# Altium PCB counter.PcbDoc
Units mm, origin at the board's own origin, x right, y up, seen from the top; angles counter-clockwise.
Board outline 100.08 x 100 mm, 2 copper layers (Top Layer, Bottom Layer); 22 components, 32 nets, 149 pads, 0 vias.
Unrouted connection lines stored in the file: 109.
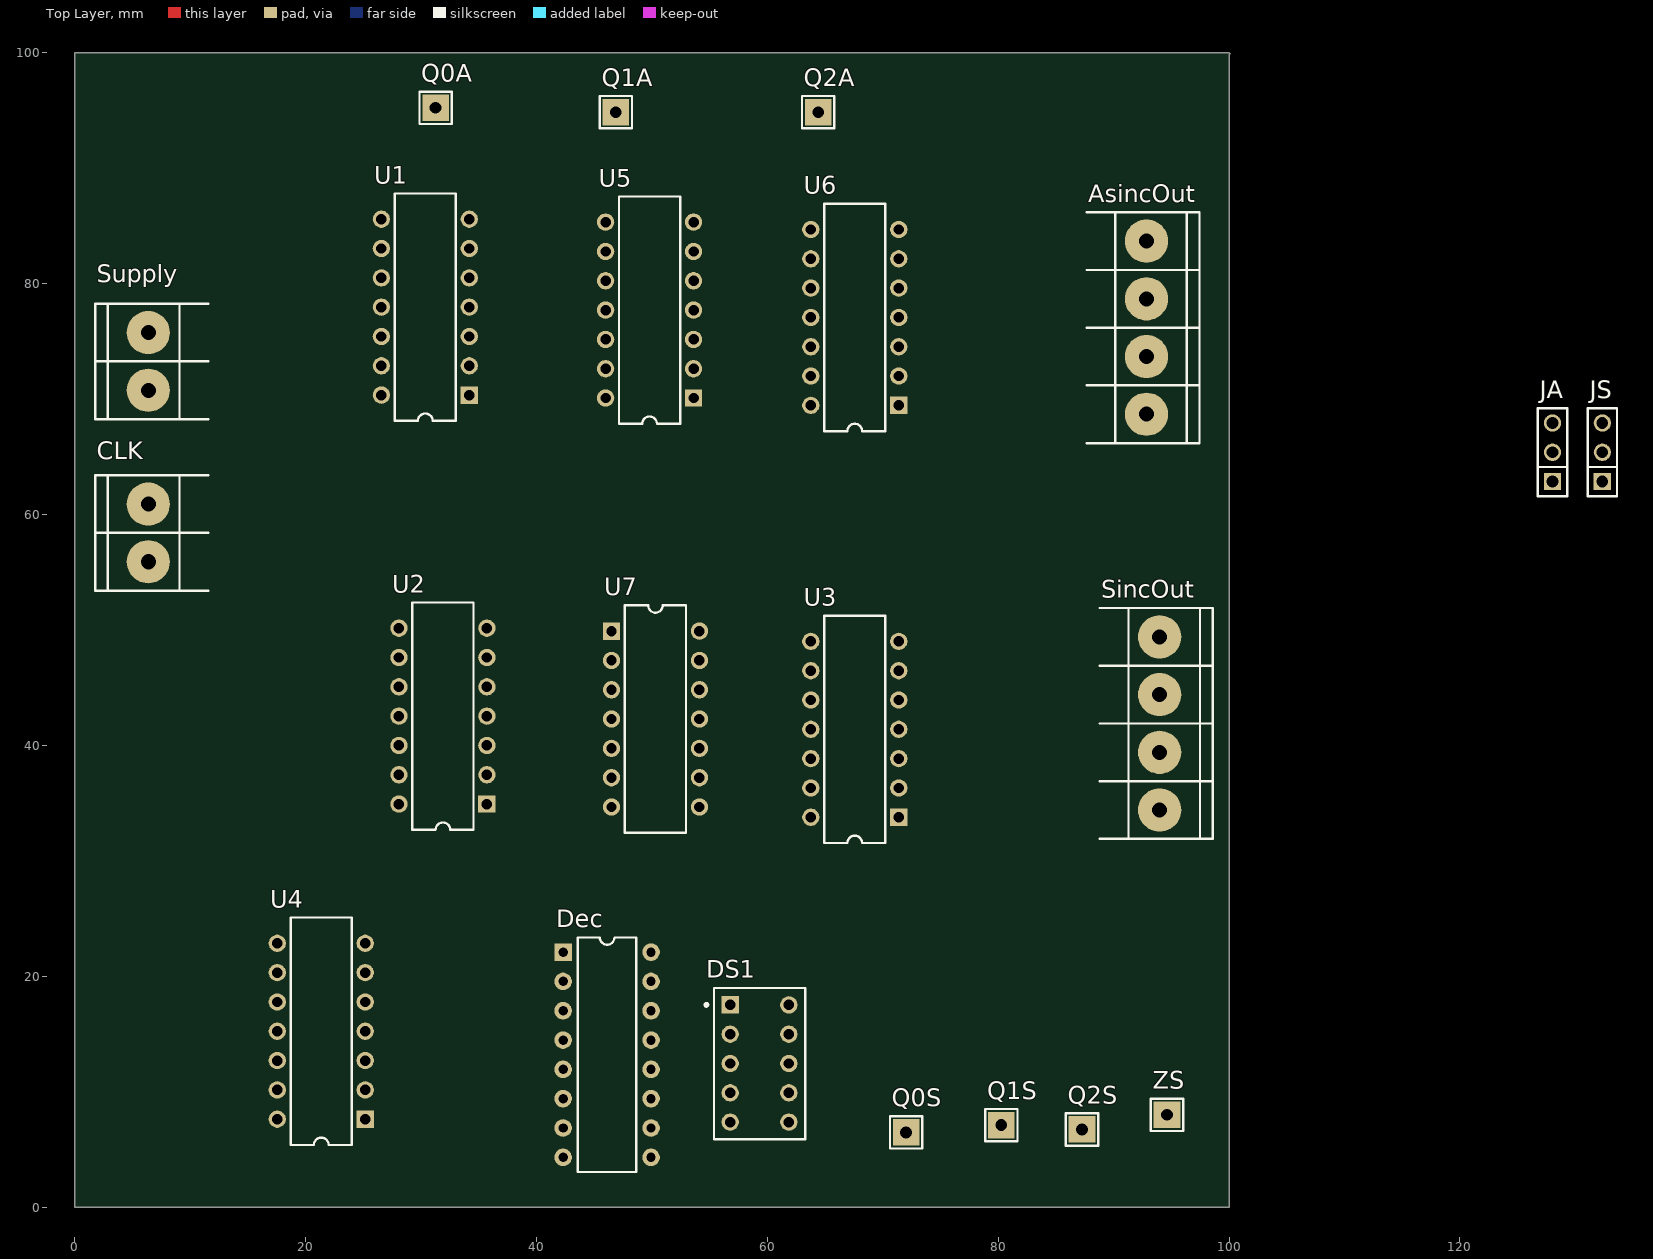
[diagram p0: Top Layer view]
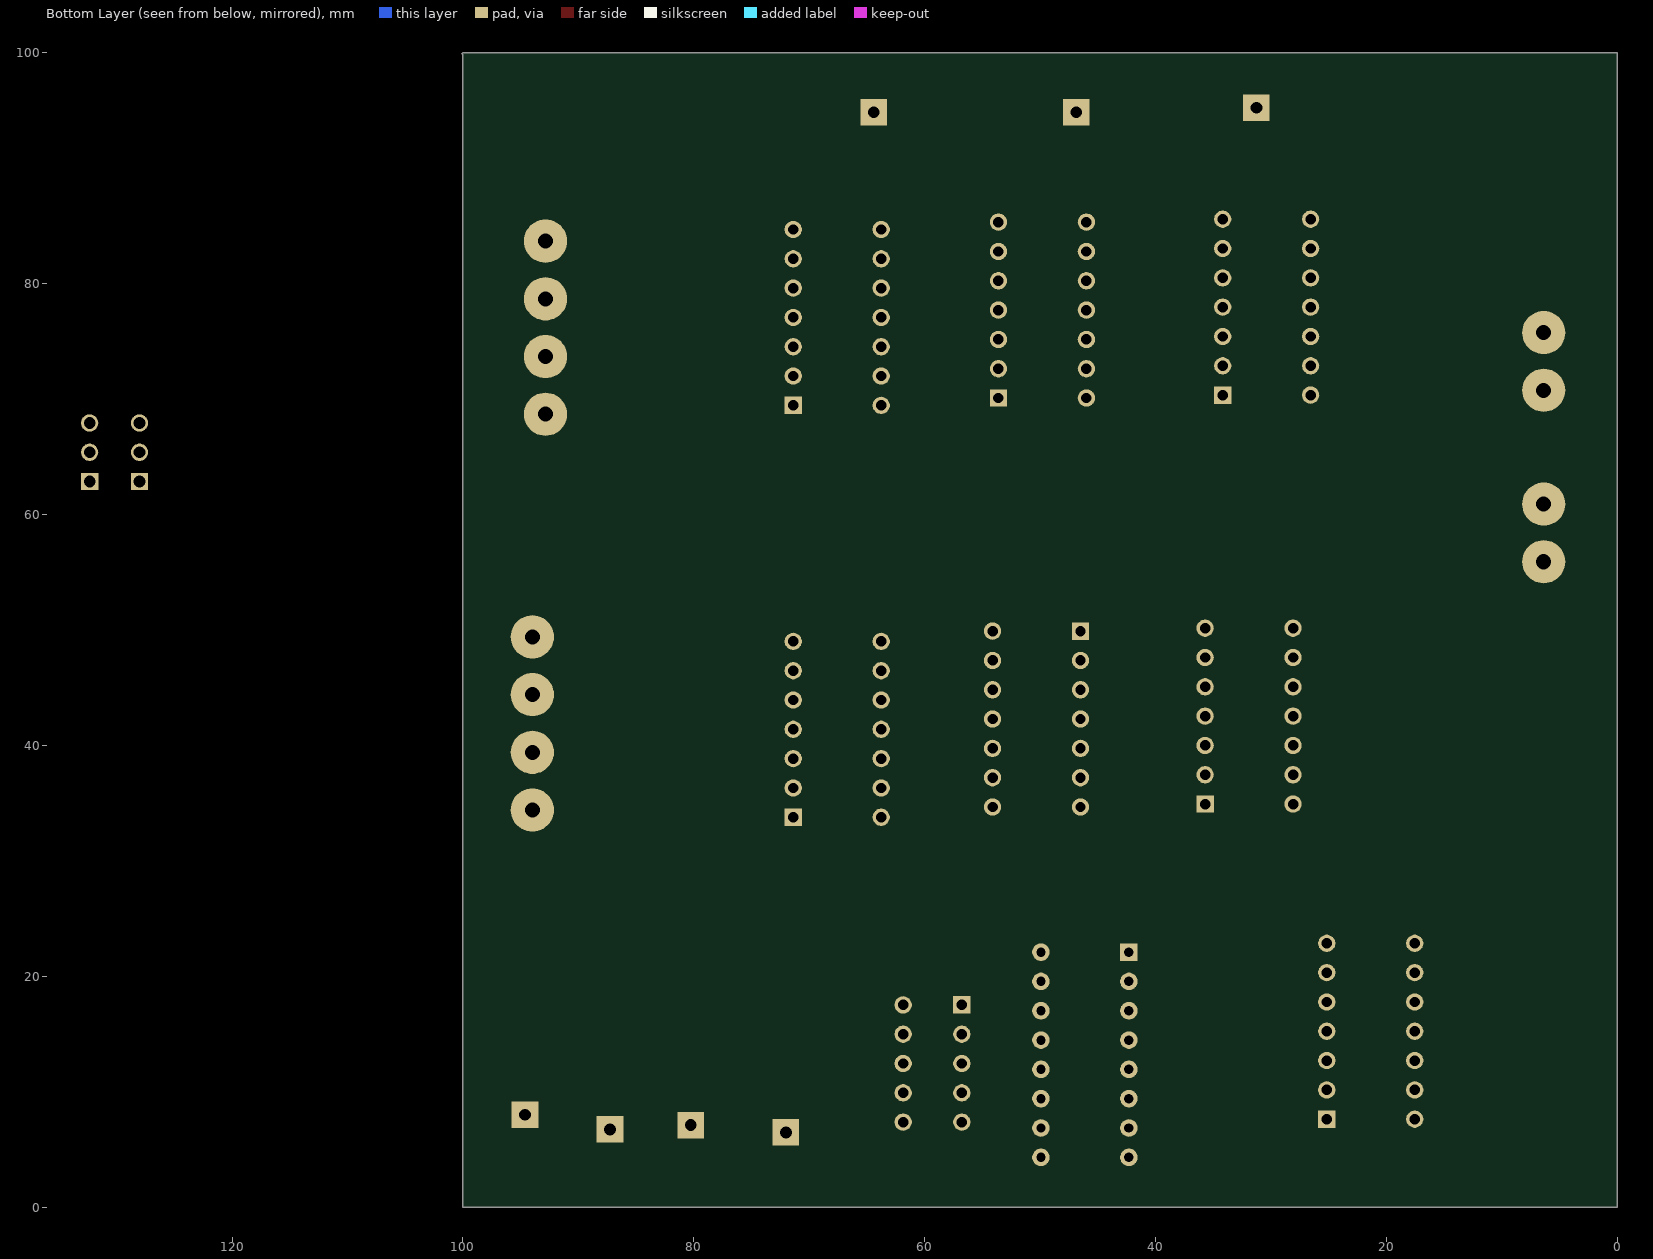
[diagram p1: Bottom Layer view, seen from below]

## Layer stack, top to bottom
Top Solder: solder mask 0.0102, Solder Resist, Dk 3.5
Top Layer: signal copper 0.0356
Dielectric 1: dielectric 0.32, FR-4, Dk 4.8
Bottom Layer: signal copper 0.0356
Bottom Solder: solder mask 0.0102, Solder Resist, Dk 3.5

## Board outline
0,0 0,100 100.025,100 100.076,99.949 100,99.873 100,0

## Design rules (kind name [scope] priority, off if disabled: settings)
Clearance [All] p1: gap=0.5
PolygonConnect [All] p1: connectstyle=Relief reliefconductorwidth=0.254 reliefentries=4 polygonreliefangle="90 Angle" airgapwidth=0.254
RoutingVias [All] p1: holewidth=0.3 width=2 viastyle="Through Hole" minholewidth=0.3 minwidth=2 maxholewidth=0.3 maxwidth=2
SolderMaskExpansion [All] p1: expansion=0.102
Width [All] p1: maxlimit=0.7 minlimit=0.7 preferedwidth=0.7
30 further rules are at their usual default settings.

## Components (designator, comment, footprint, x,y, rotation, side; value= is the part's Value field where it differs from the comment)
AsincOut "BORNERA4" BORNERA4 92.837,76.2 r180 top
CLK "BORNERA 2" BORNERA2 6.35,58.42 r0 top
Dec "CD4511" DIP16 42.291,22.098 r0 top
DS1 "Dpy Red-CC" A 59.309,12.446 r0 top
JA "JUMPER" JUMPER3 128.016,65.405 r90 top
JS "JUMPER" JUMPER3 132.334,65.405 r90 top
Q0A "TP" TPTH 31.242,95.25 r0 top
Q0S "TP" TPTH 72.009,6.477 r0 top
Q1A "TP" TPTH 46.863,94.869 r0 top
Q1S "TP" TPTH 80.264,7.112 r0 top
Q2A "TP" TPTH 64.389,94.869 r0 top
Q2S "TP" TPTH 87.249,6.731 r0 top
SincOut "BORNERA4" BORNERA4 93.98,41.91 r180 top
Supply "BORNERA 2" BORNERA2 6.35,73.279 r0 top
U1 "SN74ALS86N" N014 30.353,77.978 r90 top
U2 "SN74ALS86N" N014 31.877,42.545 r90 top
U3 "SN74ALS08N" N014 67.564,41.402 r90 top
U4 "SN74ALS32N" N014 21.336,15.24 r90 top
U5 "SN74LS74AN" N014D 49.784,77.724 r90 top
U6 "SN74LS74AN" N014D 67.564,77.089 r90 top
U7 "SN74LS74AN" N014D 50.292,42.291 r270 top
ZS "TP" TPTH 94.615,8.001 r0 top

## Footprints (in the part's own frame and the unit in brackets; to place one, negate y for a bottom-side part, rotate by r counter-clockwise, add the part's x,y. Pads: shape width x height; smd on the part's side, far side on the other; paste and mask are expansions set on the pad)
A [mm] "LED, 7-Segment Display, 7.62 mm, RHD; 10 Leads; Row Space 5.08 mm; Pitch 2.54 mm"
  rect 1.5x1.5 hole 0.9: 1(-2.54,5.08)
  round 1.5 hole 0.9: 2(-2.54,2.54) 3(-2.54,0) 4(-2.54,-2.54) 5(-2.54,-5.08) 6(2.54,-5.08) 7(2.54,-2.54) 8(2.54,0) 9(2.54,2.54) 10(2.54,5.08)
  silkscreen extent -4.72,-6.55 3.95,6.55, body extent -3.95,-6.55 3.95,6.55, height 6.34
BORNERA2 [mm] "Bornera con Tornillos 5mm separación"
  round 3.75 hole 1.3: 1(0,2.5) 2(0,-2.5)
  silkscreen extent -4.6,-5 5.2,5, body extent -3.76,-4.89 3.94,5.61, height 10
BORNERA4 [mm] "Bornera con Tornillos 5mm separación"
  round 3.75 hole 1.3: 1(0,7.5) 2(0,2.5) 3(0,-2.5) 4(0,-7.5)
  silkscreen extent -4.6,-10 5.2,10, body extent -3.76,-9.89 3.94,10.61, height 10
DIP16 [mil]
  rect 60x60 hole 32: 1(0,0)
  round 60 hole 32: 2(0,-100) 3(0,-200) 4(0,-300) 5(0,-400) 6(0,-500) 7(0,-600) 8(0,-700) 9(300,-700) 10(300,-600) 11(300,-500) 12(300,-400) 13(300,-300) 14(300,-200) 15(300,-100) 16(300,0)
  silkscreen extent 50,-750 250,50, body extent -3,-744 307,44, height 78
JUMPER3 [mm]
  rect 1.5x1.5 hole 1.016: 1(-2.54,0)
  round 1.5 hole 1.016: 2(0,0) 3(2.54,0)
  silkscreen extent -3.81,-1.27 3.81,1.27, body extent -3.81,-1.3 3.81,1.27, height 16.15
N014 [mm] "DIP; 14 Leads; Row Spacing 7.62 mm; Pitch 2.54 mm"
  rect 1.5x1.5 hole 0.9: 1(-7.62,-3.81)
  round 1.5 hole 0.9: 2(-5.08,-3.81) 3(-2.54,-3.81) 4(0,-3.81) 5(2.54,-3.81) 6(5.08,-3.81) 7(7.62,-3.81) 8(7.62,3.81) 9(5.08,3.81) 10(2.54,3.81) 11(0,3.81) 12(-2.54,3.81) 13(-5.08,3.81) 14(-7.62,3.81)
  silkscreen extent -9.85,-2.65 9.85,2.65
N014D [mm] "DIP; 14 Leads; Row Spacing 7.62 mm; Pitch 2.54 mm"
  rect 1.5x1.5 hole 0.9: 1(-7.62,-3.81)
  round 1.5 hole 0.9: 2(-5.08,-3.81) 3(-2.54,-3.81) 4(0,-3.81) 5(2.54,-3.81) 6(5.08,-3.81) 7(7.62,-3.81) 8(7.62,3.81) 9(5.08,3.81) 10(2.54,3.81) 11(0,3.81) 12(-2.54,3.81) 13(-5.08,3.81) 14(-7.62,3.81)
  silkscreen extent -9.85,-2.65 9.85,2.65
TPTH [mm]
  rect 2.3x2.3 hole 1.016: 1(0,0)
  silkscreen extent -1.4,-1.4 1.4,1.4, body extent -1.27,-1.27 1.27,1.27, height 6.04

## Part data
AsincOut SincOut: library part "BORNERA 4"
Dec: "BCD to 7 SEGMENTOS"
DS1: "7.62 mm Black Surface HER 7-Segment Display: CC, RH DP"
JA JS: library part JUMPER3
U1 U2: "Quadruple 2-Input Exclusive-OR Gate"
U3: "Quadruple 2-Input Positive-AND Gate"
U4: "Quadruple 2-Input Positive-OR Gate"
U5 U6 U7: "Dual D-Type Positive-Edge-Triggered Flip-Flop with Preset and Clear"

## Nets (pads, with @x,y where several pads share a name; then routed paths per layer and width w, separated by ;. In a path a pad name is that pad's centre, name@x,y a point inside that pad or via, vN(x,y) a via of type N, cw(c..) or ccw(c..) an arc to the next point about the centre after c; other vN are vias at no path point)
CLK: CLK.2 Dec.5 U5.3 U6.11 U7.3 U7.11
EA: JA.2 U1.2 U5.1 U5.13 U6.1
ES: JS.2 U2.2 U3.1 U6.13 U7.1 U7.13
GND: AsincOut.4 CLK.1 Dec.6 Dec.8 DS1.1 DS1.6 DS1.7 JA.3 JS.3 SincOut.4 Supply.1 U1.7 U1.12 U1.13 U2.7 U2.12 U2.13 U3.7 U3.12 U3.13 U4.7 U4.12 U4.13 U5.7 U6.7 U7.7
NetDec_9: Dec.9 DS1.4
NetDec_10: Dec.10 DS1.5
NetDec_11: Dec.11 DS1.8
NetDec_12: Dec.12 DS1.9
NetDec_13: Dec.13 DS1.10
NetDec_14: Dec.14 DS1.3
NetDec_15: Dec.15 DS1.2
NetU1_3: U1.3 U5.2
NetU1_6: U1.6 U5.12
NetU1_8: U1.8 U6.2
NetU2_3: U2.3 U6.12
NetU2_5: U2.5 U3.3 U3.4
NetU2_6: U2.6 U7.2
NetU2_8: U2.8 U7.12
NetU2_10: U2.10 U3.6 U3.9
NetU3_8: U3.8 ZS.1
NetU5_6: U5.6 U5.11
NetU5_8: U5.8 U6.3
Q0: Dec.7 U4.3
Q0A: AsincOut.1 Q0A.1 U1.1 U4.1 U5.5
Q0S: Q0S.1 SincOut.1 U2.1 U3.2 U4.2 U6.9
Q1: Dec.1 U4.6
Q1A: AsincOut.2 Q1A.1 U1.4 U4.4 U5.9
Q1S: Q1S.1 SincOut.2 U2.4 U3.5 U4.5 U7.5
Q2: Dec.2 U4.8
Q2A: AsincOut.3 Q2A.1 U1.9 U4.9 U6.5
Q2S: Q2S.1 SincOut.3 U2.9 U3.10 U4.10 U7.9
VCC: Dec.3 Dec.4 Dec.16 JA.1 JS.1 Supply.2 U1.5 U1.10 U1.14 U2.14 U3.14 U4.14 U5.4 U5.10 U5.14 U6.4 U6.10 U6.14 U7.4 U7.10 U7.14
pads on no net: U1.11 U2.11 U3.11 U4.11 U6.6 U6.8 U7.6 U7.8